# Altium PCB PCB_STM32F103C8T6.PcbDoc
Units mil, origin at the board's own origin, x right, y up, seen from the top; angles counter-clockwise.
Board outline not stored, 2 copper layers (Top Layer, Bottom Layer); 20 components, 0 nets, 90 pads, 10 vias.
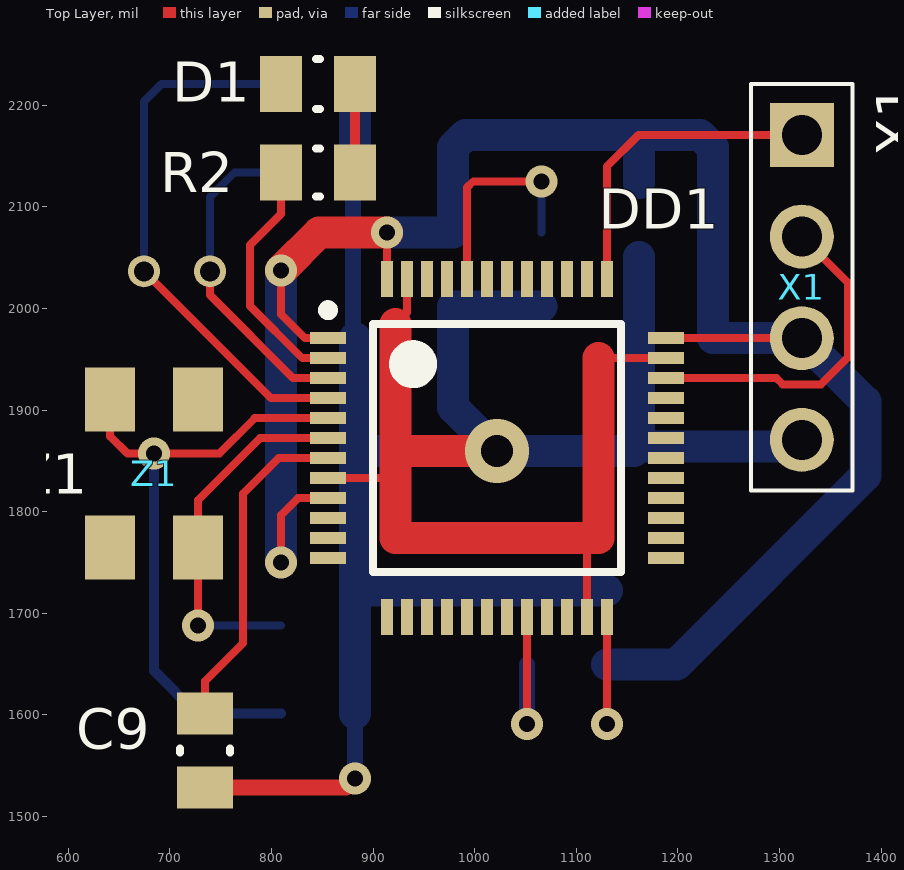
[diagram p0: Top Layer view]
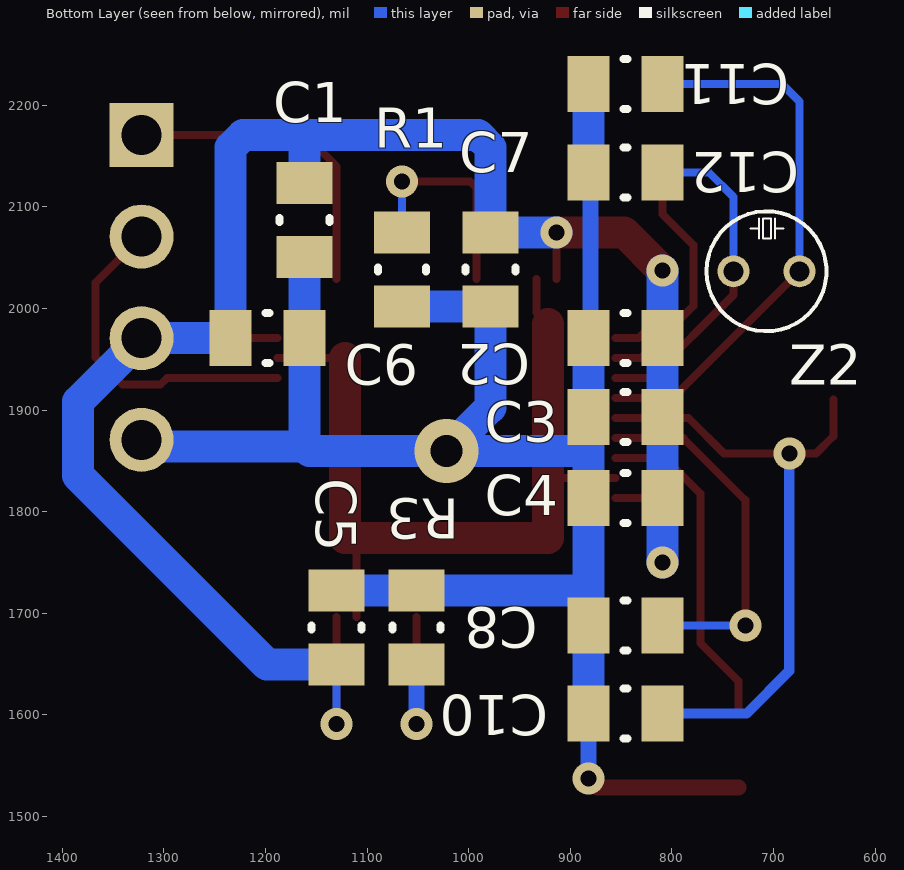
[diagram p1: Bottom Layer view, seen from below]

## Layer stack, top to bottom
Top Solder: solder mask 0.4, Solder Resist, Dk 3.5
Top Layer: signal copper 1.4
Dielectric 1: dielectric 12.6, FR-4, Dk 4.8
Bottom Layer: signal copper 1.4
Bottom Solder: solder mask 0.4, Solder Resist, Dk 3.5

## Components (designator, comment, footprint, x,y, rotation, side; value= is the part's Value field where it differs from the comment)
C1 "4.7uF" Capacitor_0805 1161.61,2087.08 r90 bottom
C2 "100nF" Capacitor_0805 845.87,1970.77 r180 bottom
C3 "1uF" Capacitor_0805 845.87,1893.23 r180 bottom
C4 "10nF" Capacitor_0805 845.87,1813.29 r180 bottom
C5 "100nF" Capacitor_0805 1130.22,1686.02 r270 bottom
C6 "100nF" Capacitor_0805 1198.03,1970.77 r0 bottom
C7 "100nF" Capacitor_0805 978.74,2038.58 r90 bottom
C8 "20pF" Capacitor_0805 845.87,1687.99 r180 bottom
C9 "100nF" Capacitor_0805 734.45,1564.79 r90 top
C10 "20pF" Capacitor_0805 845.87,1601.21 r0 bottom
C11 "10pF" Capacitor_0805 845.87,2220.81 r180 bottom
C12 "10pF" Capacitor_0805 845.87,2134.03 r180 bottom
D1 "LED_0805_G" LED_0805_G 845.87,2220.81 r180 top
DD1 "STM32F103C8T6" LQFP48 1021.95,1862.5 r0 top
R1 "10k" RESISTOR_SMD0805 1065.52,2038.58 r270 bottom
R2 "510" RESISTOR_SMD0805 845.87,2134.03 r0 top
R3 "10k" RESISTOR_SMD0805 1051.48,1686.02 r90 bottom
X1 "Connector_PLS-4" CONNECTOR_PLS-4 1321.95,2170.77 r270 top
Z1 "8MHz" Quartz_KX-9 684.45,1837.5 r90 top
Z2 "32768Hz" Quartz_32768kHz 728.57,2036.61 r180 bottom

## Footprints (in the part's own frame and the unit in brackets; to place one, negate y for a bottom-side part, rotate by r counter-clockwise, add the part's x,y. Pads: shape width x height; smd on the part's side, far side on the other; paste and mask are expansions set on the pad)
Capacitor_0805 [mm]
  rect 1.05x1.4 smd: 1(-0.925,0) 2(0.925,0)
  silkscreen extent -0.05,-0.63 0.05,0.63, body extent -1,-0.62 1,0.62, height 1.3
CONNECTOR_PLS-4 [mm]
  rect 1.6x1.6 hole 1: 1(0,0)
  round 1.6 hole 1: 2(2.54,0) 3(5.08,0) 4(7.62,0)
  silkscreen extent -1.27,-1.27 8.89,1.27, body extent -1.27,-1.27 8.89,1.27, height 8.8
LED_0805_G [mm]
  rect 1.05x1.4 smd: 1(-0.925,0) 2(0.925,0)
  silkscreen extent -0.05,-0.63 0.05,0.63, body extent -1,-0.62 1,0.63, height 1.1
LQFP48 [mm] "STM32F103C8T6"
  rect 0.9x0.3 smd mask+0.1: 1(-4.225,2.75) 2(-4.225,2.25) 3(-4.225,1.75) 4(-4.225,1.25) 5(-4.225,0.75) 6(-4.225,0.25) 7(-4.225,-0.25) 8(-4.225,-0.75) 9(-4.225,-1.25) 10(-4.225,-1.75) 11(-4.225,-2.25) 12(-4.225,-2.75) 25(4.225,-2.75) 26(4.225,-2.25) 27(4.225,-1.75) 28(4.225,-1.25) 29(4.225,-0.75) 30(4.225,-0.25) 31(4.225,0.25) 32(4.225,0.75) 33(4.225,1.25) 34(4.225,1.75) 35(4.225,2.25) 36(4.225,2.75)
  rect 0.3x0.9 smd mask+0.1: 13(-2.75,-4.225) 14(-2.25,-4.225) 15(-1.75,-4.225) 16(-1.25,-4.225) 17(-0.75,-4.225) 18(-0.25,-4.225) 19(0.25,-4.225) 20(0.75,-4.225) 21(1.25,-4.225) 22(1.75,-4.225) 23(2.25,-4.225) 24(2.75,-4.225) 37(2.75,4.225) 38(2.25,4.225) 39(1.75,4.225) 40(1.25,4.225) 41(0.75,4.225) 42(0.25,4.225) 43(-0.25,4.225) 44(-0.75,4.225) 45(-1.25,4.225) 46(-1.75,4.225) 47(-2.25,4.225) 48(-2.75,4.225)
  silkscreen extent -4.35,-3.1 3.1,3.57, body extent -4.5,-4.51 4.5,4.49, height 1.56
Quartz_32768kHz [mm]
  round 0.8 hole 0.5: 1(-0.275,0) 2(1.375,0)
  silkscreen extent -0.95,-1.5 2.05,1.5, body extent -0.95,-10.9 2.05,0.15, height 3
Quartz_KX-9 [mm] "DFN, 4-Leads, Body 3,20x5,00mm, Pitch 3,70mm, IPC Medium Density"
  rect 1.6x1.25 smd: 1(-1.85,-1.1) 2(1.85,-1.1) 3(1.85,1.1) 4(-1.85,1.1)
  body extent -2.5,-1.6 2.5,1.6, height 1.01
RESISTOR_SMD0805 [mm]
  rect 1.05x1.4 smd: 1(-0.925,0) 2(0.925,0)
  silkscreen extent -0.05,-0.6 0.05,0.6, body extent -1.1,-0.7 1.1,0.7, height 0.5

## Part data
C1 C2 C3 C4 C5 C6 C7 C8 C9 C10 C11 C12: library part Capacitor_0805
D1: "KP-2012MGC"
R1 R2 R3: library part Resistor_0805
Z1: library part Quartz_KX-9A
Z2: library part Quartz_32678Hz

## Via types
v1: diameter 31.5, hole 15.75, Top Layer to Bottom Layer, 9 vias
v2: diameter 62.99, hole 31.5, Top Layer to Bottom Layer, 1 vias

## Nets (pads, with @x,y where several pads share a name; then routed paths per layer and width w, separated by ;. In a path a pad name is that pad's centre, name@x,y a point inside that pad or via, vN(x,y) a via of type N, cw(c..) or ccw(c..) an arc to the next point about the centre after c; other vN are vias at no path point)
pads on no net: C1.1 C1.2 C2.1 C2.2 C3.1 C3.2 C4.1 C4.2 C5.1 C5.2 C6.1 C6.2 C7.1 C7.2 C8.1 C8.2 C9.1 C9.2 C10.1 C10.2 C11.1 C11.2 C12.1 C12.2 D1.1 D1.2 DD1.1 DD1.2 DD1.3 DD1.4 DD1.5 DD1.6 DD1.7 DD1.8 DD1.9 DD1.10 DD1.11 DD1.12 DD1.13 DD1.14 DD1.15 DD1.16 DD1.17 DD1.18 DD1.19 DD1.20 DD1.21 DD1.22 DD1.23 DD1.24 DD1.25 DD1.26 DD1.27 DD1.28 DD1.29 DD1.30 DD1.31 DD1.32 DD1.33 DD1.34 DD1.35 DD1.36 DD1.37 DD1.38 DD1.39 DD1.40 DD1.41 DD1.42 DD1.43 DD1.44 DD1.45 DD1.46 DD1.47 DD1.48 R1.1 R1.2 R2.1 R2.2 R3.1 R3.2 X1.1 X1.2 X1.3 X1.4 Z1.1 Z1.2 Z1.3 Z1.4 Z2.1 Z2.2
copper on no net: | length 8609.6
  Top Layer w7.87: 641.14,1910.33 641.14,1874.15 658.11,1857.18 v1(684.45,1857.18) 748.62,1857.18 783.46,1892.03 855.61,1892.03 ; 674.44,2036.61 799.34,1911.71 855.61,1911.71 ; v1(727.76,1687.99) 727.76,1764.67 727.76,1811.32 788.78,1872.34 855.61,1872.34 ; 734.45,1601.21 734.45,1633.17 771.85,1670.57 771.85,1817.72 806.79,1852.66 855.61,1852.66 ; 739.4,2036.61 739.4,2013.26 821.26,1931.4 855.61,1931.4 ; v1(809.45,1750) 809.45,1796.56 826.18,1813.29 855.61,1813.29 ; v1(809.45,2037.5) 809.45,1994.29 832.97,1970.77 855.61,1970.77 ; 809.45,2134.03 809.45,2093.01 778.94,2062.5 778.94,2002.48 830.33,1951.08 855.61,1951.08 ; 855.61,1832.97 917.42,1832.97 921.95,1837.5 ; 913.68,2028.84 v1(913.68,2075) ; 921.95,1984.55 933.37,1995.96 933.37,2028.84 ; 992.42,2028.84 992.42,2119 998.62,2125.2 v1(1065.52,2125.2) ; v1(1051.48,1591) 1051.48,1696.16 ; 1110.53,1696.16 1110.53,1762.5 1121.95,1773.92 ; 1121.95,1951.08 1188.29,1951.08 ; v1(1130.22,1591) 1130.22,1696.16 ; 1130.22,2028.84 1130.22,2139.94 1161.05,2170.77 1321.95,2170.77 ; 1188.29,1931.4 1297.07,1931.4 1303.13,1925.33 1340.77,1925.33 1367.38,1951.95 1367.38,2025.33 1321.95,2070.77 ; 1188.29,1970.77 1321.95,1970.77
  Top Layer w10: 882.28,2134.03 882.28,2220.81
  Top Layer w15.75: 734.45,1528.38 873.16,1528.38 v1(882.28,1537.5)
  Top Layer w31.5: v1(809.45,2037.5) 846.95,2075 v1(913.68,2075) ; 921.95,1984.55 921.95,1859.5 ; v2(1021.95,1859.5) 921.95,1859.5 ; 1121.95,1951.08 1121.95,1773.92 921.95,1773.92 921.95,1837.5 921.95,1859.5
  Bottom Layer w7.87: 674.44,2036.61 674.44,2203.62 691.63,2220.81 809.45,2220.81 ; v1(727.76,1687.99) 809.45,1687.99 ; 739.4,2036.61 739.4,2109.65 763.78,2134.03 809.45,2134.03 ; 1065.52,2075 v1(1065.52,2125.2) ; v1(1130.22,1591) 1130.22,1649.61
  Bottom Layer w10: v1(684.45,1857.18) 684.45,1643.32 726.55,1601.21 809.45,1601.21
  Bottom Layer w15.75: v1(882.28,1537.5) 882.28,1601.21 ; 882.28,1970.77 880.06,1972.99 880.06,2131.81 882.28,2134.03 ; v1(1051.48,1591) 1051.48,1649.61
  Bottom Layer w31.5: v1(809.45,1750) 809.45,1813.29 809.45,1893.23 809.45,1970.77 v1(809.45,2037.5) ; 882.28,1601.21 882.28,1687.99 882.28,1726.87 ; 882.28,1970.77 882.28,1893.23 882.28,1862.5 ; 882.28,2134.03 882.28,2220.81 ; v1(913.68,2075) 978.74,2075 978.74,2158.64 990.87,2170.77 1161.05,2170.77 ; 1065.52,2002.17 978.74,2002.17 978.74,1902.72 v2(1021.95,1859.5) ; 1130.22,1649.61 1198.5,1649.61 1384.45,1835.55 1384.45,1908.27 1321.95,1970.77 ; 1130.22,1722.44 1051.48,1722.44 886.71,1722.44 882.28,1726.87 ; 1161.61,2050.66 1161.61,1970.77 1161.61,1864.37 ; 1161.61,2123.49 1161.61,2170.2 1161.05,2170.77 ; 1292.72,1970.77 1234.45,1970.77 1234.45,2158.27 1221.95,2170.77 1161.05,2170.77 ; 1321.95,1870.77 1315.55,1864.37 1161.61,1864.37 ; 882.28,1726.87 882.28,1813.29 882.28,1862.5 ; 882.28,1862.5 885.28,1859.5 v2(1021.95,1859.5) ; v2(1021.95,1859.5) 1156.75,1859.5 1161.61,1864.37